# Altium PCB USB_soundcard PCB.pcbdoc (part 2 of 2)
Units mil, origin at the board's own origin, x right, y up, seen from the top; angles counter-clockwise.
Board outline 41897 x 30671 mil, 2 copper layers (Top Layer, Bottom Layer); 93 components, 106 nets, 313 pads, 255 vias.
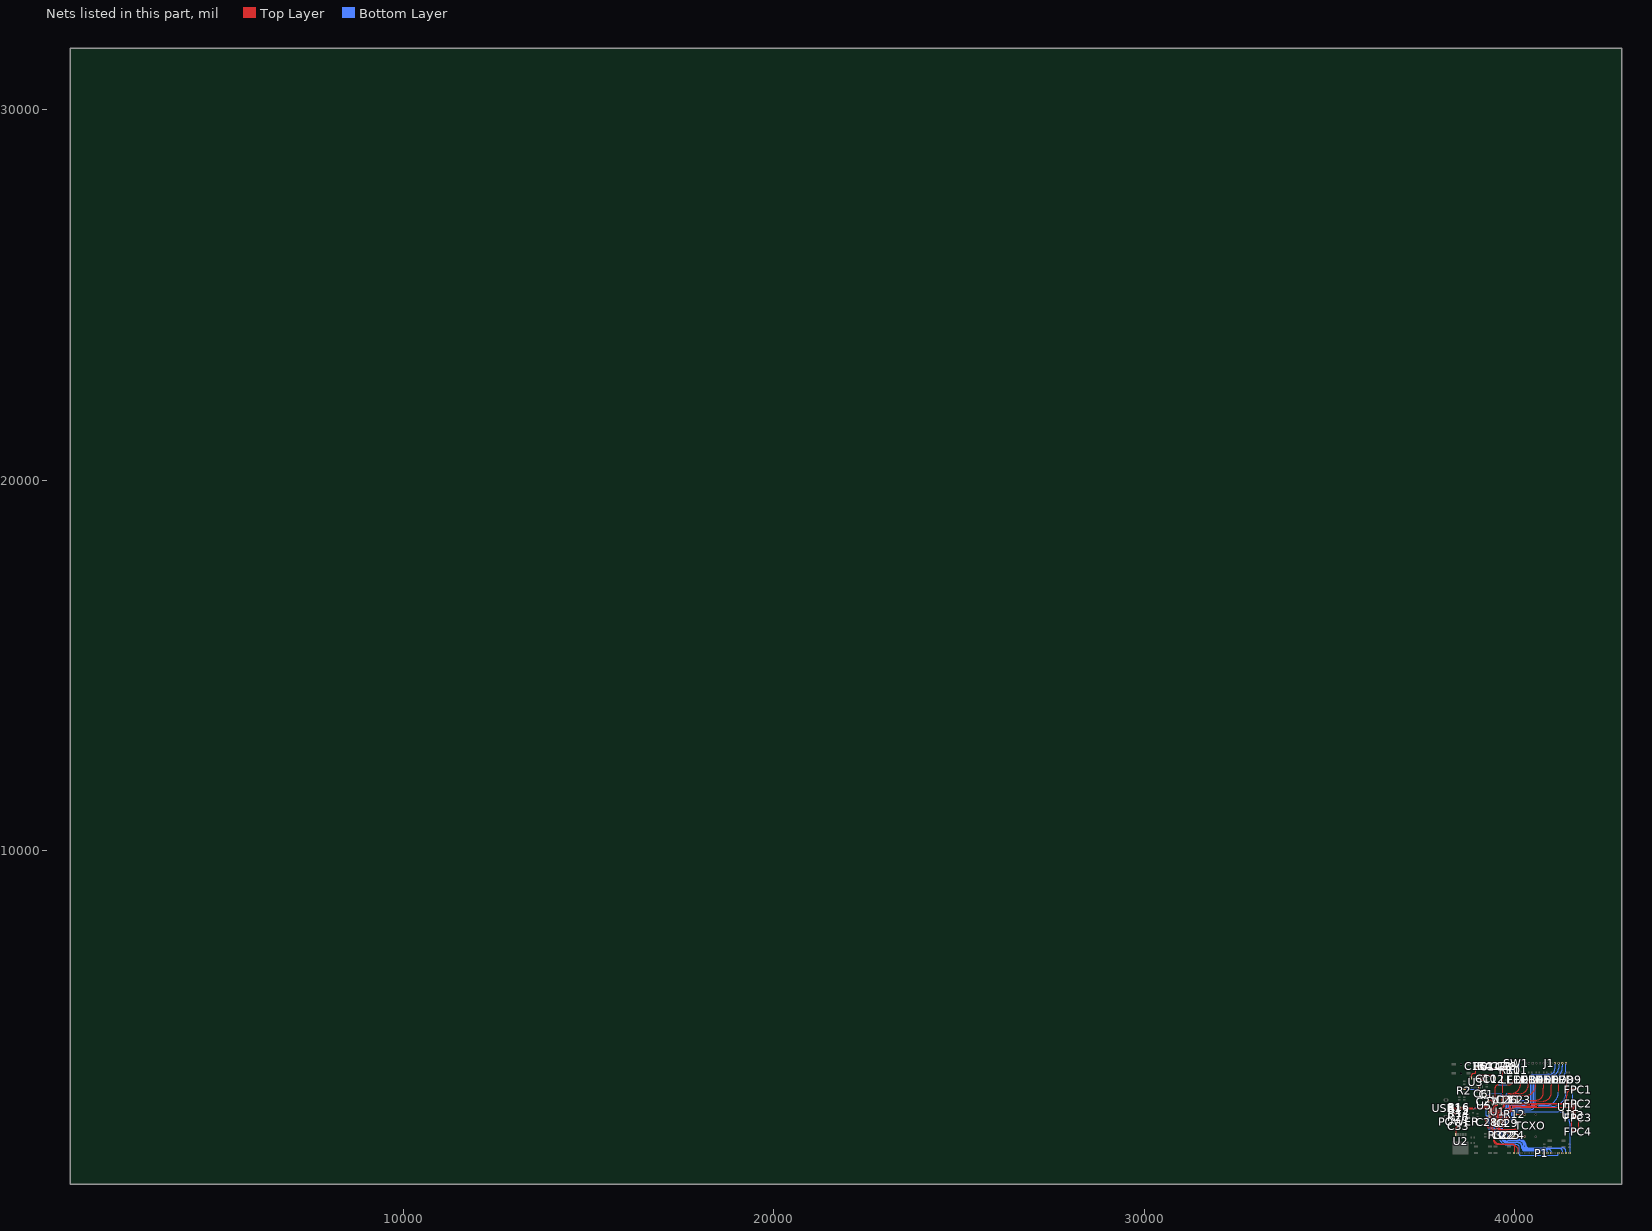
[diagram p2: the nets of this part, all layers, seen from the top]

## Via types
v1: diameter 24, hole 12, Top Layer to Bottom Layer, tented both sides, 255 vias

## Nets (pads, with @x,y where several pads share a name; then routed paths per layer and width w, separated by ;. In a path a pad name is that pad's centre, name@x,y a point inside that pad or via, vN(x,y) a via of type N, cw(c..) or ccw(c..) an arc to the next point about the centre after c; other vN are vias at no path point) (continued)
PB2: LED2.2 U1.28 | length 1053.1
  Top Layer w6: U1.28@39468.04,3167.5 39467.93,3402 39467.93,3586.93 cw(c39559,3586.93) v1(39559,3678) ; v1@39799,3678.1 39832.7,3678 ; 39832.66,3678.05 ccw(c39832.66,3816.05) LED2.2@39970.65,3816.05
  Bottom Layer w6: v1(39559,3678) 39798.9,3678 v1@39799,3678.1 ; 39753.95,3678 ccw(c39753.95,3678.05) 39754,3678.05
  other v1: 39799,3678.05
PB3: LED3.2 U1.55 | length 1557.1
  Top Layer w6: U1.55@39507.4,2730.5 39507.41,2777.41 cw(c39508,2777.41) 39508,2778 39508,2943 39523,2958 v1(39676,2958) ; v1(39805,3435.05) 39883,3441 ; 39883,3441.05 ccw(c39883,3720.05) 40162,3720.05 40162,3809.39 cw(c40168.66,3809.39) LED3.2@40168.65,3816.05 ccw(c40168.66,3812.39) LED3.2@40165,3812.39
  Bottom Layer w6: v1(39676,2958) 39688,2958 39754,3024 39754,3048 39754,3390 ; 39754,3390.05 cw(c39799,3390.05) 39799,3435.05 v1(39805,3435.05)
PB5: LED5.2 U1.57 | length 1920.4
  Top Layer w6: U1.57@39546.78,2730.5 ccw(c39546.78,2730.72) 39547,2730.72 39547,2910 cw(c39571.05,2910) 39571.05,2934.05 v1(39607,2934.05) ; v1@39865,3387.05 40279,3387.05 ccw(c40279,3678.05) 40570,3678.05 40570,3816.05 40573.65,3816.05 ccw(c40573.66,3812.39) LED5.2@40570,3812.39
  Bottom Layer w6: v1@39607,2931.05 cw(c39610,2931.05) v1@39610,2934.05 ; v1(39607,2934.05) 39697,2934 ; 39697,2934.05 ccw(c39697,3025.98) 39788.93,3025.98 39788.93,3061.98 ; 39788.93,3064.98 39788.93,3061.98 ; v1(39868.33,3387.05) ccw(c39868.33,3307.66) 39788.93,3307.66 39788.93,3061.98
PB6: LED6.2 U1.58 | length 2098
  Top Layer w6: U1.58@39566.46,2730.5 39566.47,2824.52 39566.47,2827.52 ; 39566.5,2827.5 39566.5,2874 cw(c39581.5,2874) 39581.5,2889 39592,2889 cw(c39592.05,2889) 39592.05,2889.05 v1(39607,2889.05) ; v1(40309,3270) 40569.2,3267 ; 40569.24,3267 ccw(c40569.24,3475.42) 40777.66,3475.42 ; 40777.66,3471.7 40777.66,3591.7 LED6.2@40777.65,3816.05
  Bottom Layer w6: v1(39607,2889.05) cw(c39616,2889.05) 39616,2898.05 39646,2898.05 39718,2898.05 ccw(c39718,3021.05) 39841,3021.05 39841,3036.05 39841,3074.45 39841,3144.05 cw(c39963.95,3144.05) 39963.95,3267 ; 39961,3267 v1(40309,3270)
PB7: LED7.2 U1.59 | length 2356.8
  Top Layer w6: U1.59@39586,2730.35 39583,2814 v1(39589,2865) ccw(c39589,2862.15) v1@39586.15,2862.15 ; v1(40351,3246) 40765,3243 ccw(c40765,3465) 40987,3465 40987,3546.46 ; 40987,3468 40987,3612.05 40987,3674.39 LED7.2@40987,3810.05
  Bottom Layer w6: v1(39589,2865) 39613,2865 39637,2886 39646,2886 ; 39646,2886.05 39709,2886.05 39730,2886.05 ccw(c39730,3012.05) 39856,3012.05 ; 39856,3012 39856,3105 39856,3138 ; 39856,3135.2 cw(c39966.8,3135.2) 39966.8,3246 v1(40351,3246)
PB8: LED8.2 U1.61 | length 2380.6
  Top Layer w6: U1.61@39625.51,2730.5 39625.5,2796.5 39667,2838 v1@39667,2841.1 ; v1(40306,3132) v1(40624,3132) ; v1(41182,3486.05) 41182,3606.05 41182,3815.35 cw(c41182.7,3815.35) LED8.2@41182.7,3816.05 ; LED8.2@41182,3815.39 cw(c41182.66,3815.39) LED8.2@41182.66,3816.05
  Bottom Layer w6: v1(39667,2841.05) 39682,2841.05 ccw(c39682,3033.05) 39874,3033.05 39874,3047.35 39874,3072.05 39874,3108.05 cw(c39898,3108.05) 39898,3132.05 v1@40312,3132 ; v1(40624,3132) 40828,3132 ; 40828,3132.05 ccw(c40828,3486.05) v1(41182,3486.05)
PC0: P1.8 U1.8 | length 2427.2
  Top Layer w6: v1(39607,2808) 39607,2823 39723.1,2939.2 U1.8@39755.43,2939.16 ; U1.8@39735.11,2939.16 U1.8@39755.43,2939.16 ccw(c39754.55,2939.16) U1.8@39754.55,2940.05
  Bottom Layer w6: 39454,2478 39454,2793 39487.1,2808 v1(39607,2808) ; 39454,2481.9 39454,2472.05 ccw(c39487,2472.05) 39487,2439.05 39523,2439.05 cw(c39523,2304.05) 39658,2304.05 39658,2286.05 ccw(c39805,2286.05) 39805,2139.05 39973,2139.05 39997,2139.05 40060,2139.05 cw(c40060,1980.05) 40219,1980.05 40219,1971.05 ccw(c40276,1971.05) 40276,1914.05 40312,1914.05 40417,1914.05 40615,1914.05 40732,1914.05 cw(c40732,1862.12) 40783.93,1862.12 P1.8@40783.93,1839
PC2: J1.7 U1.10 | length 2466.4
  Top Layer w6: U1.10@39755.43,2978.53 cw(c39755.96,2978.53) 39755.96,2979.05 39808,2979.05 ccw(c39808.05,2979.05) 39808.05,2979 39835,2979 ccw(c39835,3042) 39898,3042 39898,3102 cw(c39910,3102) 39910,3114 40059.9,3114 40258,3153 40270,3156 v1(40423,3153)
  Bottom Layer w6: v1@40420,3156 v1(40423,3153) ; v1@40420,3156.05 ccw(c40420,3171.05) 40435,3171.05 40435,3837.05 40435,3924.05 cw(c40471,3924.05) 40471,3960.05 40888,3960.05 40933,3960.05 ccw(c40933,4110.05) 41083,4110.05 41083,4265.11 cw(c41083.94,4265.11) J1.7@41083.94,4266.05
PC4: LED4.2 U1.24 | length 1336.6
  Top Layer w6: v1(39532,3377.36) 39532,3225 39547,3210 39547,3167.72 cw(c39546.78,3167.72) U1.24@39546.78,3167.5 ; v1(39705.02,3399) 40021,3435 40111,3435 ccw(c40111,3696) 40372,3696 40372,3815.4 cw(c40372.65,3815.4) LED4.2@40372.65,3816.05
  Bottom Layer w6: v1(39532,3377.36) 39553.64,3399 v1(39705.02,3399)
PC5: P1.4 U1.25 | length 3214.1
  Top Layer w6: v1(39442,3030) 39463,3051 39463,3084 ; 39463,3084.05 cw(c39496,3084.05) 39496,3117.05 39511,3117.05 ccw(c39511,3133.15) 39527.1,3133.15 U1.25@39527.1,3167.5
  Bottom Layer w6: 39295,2881.17 39295,2892 39382,2979 39433,3030 v1(39442,3030) ; 39295,2883 39295,2520.05 ccw(c39436,2520.05) 39436,2379.05 39457,2379.05 39517,2379.05 cw(c39517,2307.05) 39589,2307.05 39589,2265.05 ccw(c39790,2265.05) 39790,2064.05 39997,2064.05 40048,2064.05 cw(c40048,1986.05) 40126,1986.05 40126,1848.05 40126,1809.05 ccw(c40162,1809.05) 40162,1773.05 41117.98,1773.05 ccw(c41117.98,1839) P1.4@41183.93,1839
PC8: P1.9 U1.39 | length 2232.6
  Top Layer w6: U1.39@39318.43,2978.53 39388,2979 v1(39415,2979) ; v1(39430,2880) 39430,2874 39430,2814 v1(39436,2808)
  Bottom Layer w6: v1(39415,2979) v1(39430,2880) ; 39436,2466 v1(39436,2808) ; 39436,2466.05 39436,2457.05 ccw(c39469,2457.05) 39469,2424.05 39526,2424.05 cw(c39526,2313.05) 39637,2313.05 39637,2271.05 ccw(c39790,2271.05) 39790,2118.05 39991,2118.05 40027.06,2118.05 40066.46,2118.05 cw(c40066.46,1986.67) 40197.84,1986.67 40197.84,1974.16 ccw(c40273,1974.16) 40273,1899 cw(c40273.05,1899) 40273.05,1899.05 40519,1899.05 40648,1899.05 cw(c40648,1863.12) P1.9@40683.93,1863.12
PC9: LED9.2 U1.40 | length 2913.9
  Top Layer w6: U1.40@39318.43,2958.84 ccw(c39319.28,2958.84) 39319.28,2958 39439,2958 v1(39442,2961) ; v1(39463,2880) v1(39466,2823) ; v1(39919,3093) 40606.4,3093 v1(40612.46,3099.05) ; v1(41389,3501) 41389,3812.4 cw(c41389.65,3812.4) LED9.2@41389.65,3813.05
  Bottom Layer w6: v1(39442,2961) v1(39463,2880) ; v1(39466,2823) 39472,2823 39478,2829 39622,2829 39634,2817 39672.95,2817 ccw(c39672.95,3030.05) 39886,3030.05 39886,3036.05 39886,3069.05 39886,3078 cw(c39901,3078) 39901,3093 v1(39919,3093) ; v1@40609,3099.05 41001.91,3099.05 ccw(c41001.91,3486.14) 41389,3486.14
PC10: P1.7 U1.51 | length 2090.3
  Top Layer w6: U1.51@39428.67,2730.5 39428.67,2605.38 ccw(c39457,2605.38) 39457,2577.05 39463,2577.05 cw(c39463,2532.05) 39508,2532.05 ; v1@39508,2466.1 39508,2532
  Bottom Layer w6: v1(39508,2466.05) ccw(c39520,2466.05) 39520,2454.05 39541,2454.05 39544,2454.05 cw(c39544,2322.05) 39676,2322.05 39676,2304.05 ccw(c39811,2304.05) 39811,2169.05 40126,2169.05 cw(c40126,2049.05) 40246,2049.05 40246,2001.05 ccw(c40315,2001.05) 40315,1932.05 40489,1932.05 40759,1932.05 40828,1932.05 cw(c40828,1876.12) 40883.93,1876.12 P1.7@40883.93,1839
PC11: P1.6 U1.52 | length 2185.6
  Top Layer w6: U1.52@39448.36,2730.5 39448.36,2621.69 ccw(c39466,2621.69) 39466,2604.05 39487,2604.05 cw(c39487,2538.05) 39553,2538.05 39553,2511.05 ccw(c39616,2511.05) 39616,2448.05 39739,2448.05 39748,2448.05 39757,2448.05 39772,2448.05 cw(c39772,2424.05) 39796,2424.05 39796,2397.05 v1(39793,2394.05)
  Bottom Layer w6: v1(39793,2394.05) 39796,2394 39796,2292 ; 39796,2292.05 ccw(c39901,2292.05) 39901,2187.05 40138,2187.05 cw(c40138,2055.05) 40270,2055.05 40270,2034.05 ccw(c40357,2034.05) 40357,1947.05 40564,1947.05 40906,1947.05 cw(c40906,1869.12) 40983.93,1869.12 P1.6@40983.93,1839
PC12: P1.3 U1.53 | length 2454.2
  Top Layer w6: U1.53@39468.04,2730.5 39468.04,2632.01 ccw(c39478,2632.01) 39478,2622.05 39484,2622.05 cw(c39484,2532.05) 39574,2532.05 39574,2517.05 ccw(c39625,2517.05) 39625,2466.05 39736,2466.05 39757,2466.05 39763,2466.05 cw(c39763,2409.05) 39820,2409.05 ; v1@39817,2358.1 39820,2409
  Bottom Layer w6: v1(39817,2358.05) 39817,2289.05 ccw(c39904,2289.05) 39904,2202.05 39907.43,2202.05 ; 39907,2202.05 40138,2202.05 cw(c40138,2046.05) 40294,2046.05 40294,2043.05 ccw(c40372,2043.05) 40372,1965.05 40918,1965.05 41215,1965.05 cw(c41215,1896.12) 41283.93,1896.12 P1.3@41283.93,1839
PC13: J1.8 U1.2 | length 2656.8
  Top Layer w6: U1.2@39755.4,2821.1 39757.4,2823 v1(39877,2820.05)
  Bottom Layer w6: v1(39877,2820.05) ccw(c39877,2865.05) 39922,2865.05 39922,2964.05 39922,3012.05 cw(c39988,3012.05) 39988,3078.05 40210,3078.05 40324,3078.05 40378,3078.05 ccw(c40378,3180.05) 40480,3180.05 40480,3226.57 40480,3834.05 cw(c40579,3834.05) 40579,3933.05 40984,3933.05 ccw(c40984,4134.05) 41185,4134.05 41185,4264.99 ccw(c41183.94,4264.99) J1.8@41183.94,4266.05
PC14: J1.9 U1.3 | length 2934.3
  Top Layer w6: U1.3@39755.43,2840.73 39726.68,2840.73 ccw(c39726.68,2823.05) 39709,2823.05 39709,2796.05 ccw(c39730.05,2796.05) 39730.05,2775 39733,2775 v1(39877,2775.05)
  Bottom Layer w6: v1(39877,2775.05) 39892,2775 ; 39892,2775.05 ccw(c39892,2823.05) 39940,2823.05 39940,2862.05 39940,2934.05 39940,3012.05 cw(c39988,3012.05) 39988,3060.05 40117,3060.05 40387,3060.05 ccw(c40387,3192.05) 40519,3192.05 40519,3816.05 cw(c40600,3816.05) 40600,3897.05 41002,3897.05 41056,3897.05 ccw(c41056,4125.05) 41284,4125.05 41284,4179.05 ; J1.9@41283.94,4266.05 cw(c41283.94,4265.99) 41284,4265.99 41284,4175.83
PC15: J1.10 U1.4 | length 3120.7
  Top Layer w6: 39733,2751 39733.05,2751.05 v1(39853,2751.05) ; 39733,2751.05 cw(c39733,2793.05) 39691,2793.05 39691,2796.05 39691,2811.05 cw(c39740.37,2811.05) 39740.37,2860.42 U1.4@39755.43,2860.42
  Bottom Layer w6: v1(39853,2751.05) 39901,2751.05 ccw(c39901,2808.05) 39958,2808.05 39958,2862.05 39958,2976.05 cw(c39988,2976.05) 39988,3006.05 40414,3006.05 ccw(c40414,3141.05) 40549,3141.05 40549,3399.05 40549,3786.05 40549,3798.05 cw(c40612,3798.05) 40612,3861.05 41080,3861.05 41152,3861.05 ccw(c41152,4092.99) 41383.94,4092.99 J1.10@41383.94,4266.05
PD2: P1.2 U1.54 | length 2550.2
  Top Layer w6: U1.54@39487.72,2730.5 ccw(c39487.73,2729.77) 39487,2729.77 39487,2646.05 ccw(c39496,2646.05) 39496,2637.05 39511,2637.05 cw(c39511,2553.05) 39595,2553.05 39595,2517.05 ccw(c39628,2517.05) 39628,2484.05 39736,2484.05 40003,2484.05 cw(c40003,2418.05) 40069,2418.05 v1(40069,2358.05)
  Bottom Layer w6: v1(40069,2358.05) 40069,2244.05 ccw(c40096,2244.05) 40096,2217.05 40129,2217.05 cw(c40129,2034.05) 40312,2034.05 ccw(c40363,2034.05) 40363,1983.05 40411,1983.05 40975,1983.05 41281,1983.05 cw(c41281,1880.12) 41383.93,1880.12 P1.2@41383.93,1839
PH1: P1.1 U1.6 | length 2747.6
  Top Layer w6: v1(39988,2955.05) 39835.33,2937.38 ccw(c39835.33,2916.05) 39814,2916.05 39814,2913.05 cw(c39802,2913.05) 39802,2901.05 U1.6@39756.7,2901.05 ; U1.6@39756.7,2901.05 ccw(c39756.7,2899.79) U1.6@39755.43,2899.79 cw(c39756.7,2899.79) U1.6@39756.7,2901.05
  Bottom Layer w6: v1(39988,2955.05) 41178.95,2955 ; 41172.85,2955 cw(c41172.85,2643.92) 41483.93,2643.92 P1.1@41483.93,1839
  Bottom Layer w10: v1(39988,2955.05) ccw(c39991.05,2955.05) v1@39991.05,2952
POWER_1: POWER.1 R26.1 | length 117.6
  Top Layer w15: R26.1@38457.63,2805.05 cw(c38457.63,2804.03) R26.1@38458.65,2804.03
  Top Layer w20: POWER.1@38458.65,2688.05 R26.1@38458.65,2804.03
R10_2: R10.2 SW1.3 | length 146.2
  Bottom Layer w15: R10.2@39922,4077 39922,4173.89 cw(c39953.42,4173.89) SW1.3@39953.42,4205.31
S$423: 
S$432: 
S$5796: 
S$5890: 
S$12789: 
S$18079: 
S$18081: 
S$18084: 
S$18087: 
S$18089: 
S$18092: 
S$19015: 
S$19059: 
S$22385: 
S$24787: 
S$24847: 
S$24849: 
S$25444: 
S$26904: 
S$26910: 
S$26912: 
SAI1_FS_A: U1.17 U12.1 | length 105.7
  Top Layer w6: U1.17@39684.57,3167.5 39685,3167.92 U12.1@39685,3273
SAI1_FS_B: U1.62 U4.1 | length 101.7
  Top Layer w6: U4.1@39622,2643 ccw(c39622,2667) 39646,2667 39646,2673 39646,2679 39646,2688 39646,2729.71 ccw(c39645.21,2729.71) U1.62@39645.21,2730.5
SAI1_SCK_A: U1.29 U1.37 | length 238.1
  Top Layer w6: U1.37@39318.43,3017.9 39351.85,3017.9 ccw(c39351.85,3114.05) 39448,3114.05 39448,3167.14 cw(c39448.36,3167.14) U1.29@39448.36,3167.5
SAI1_SCK_B: U1.33 U5.1 | length 156.8
  Top Layer w6: U5.1@39175,3120 ccw(c39198.36,3120) 39198.36,3096.64 U1.33@39318.43,3096.64
SAI1_SD_A: FPC2.2 FPC4.2 U1.9 U11.1 | length 2886
  Top Layer w6: 40021,3075 39982,3075.05 ccw(c39982,3033.05) 39940,3033.05 39940,3030.05 cw(c39868,3030.05) 39868,2958.05 39823,2958.05 U1.9@39756.23,2958.05 ; 40021,3075.05 40036,3075.05 40165,3075.05 v1(41533,3075) cw(c41533,3063) 41545,3063 41545,2829 ; U11.1@41464,3075 41538.3,3075 cw(c41538.3,3075.37) v1@41537.93,3075.37 ; 41545,2833.11 41545,2490 ccw(c41608,2490) 41608,2427 FPC4.2@41669.98,2427 ; v1(41617,3171) 41638,3177 FPC2.2@41670.82,3177.84 cw(c41669.98,3177.85) FPC2.2@41669.98,3177 ; U1.9@39756.23,2958.05 cw(c39756.23,2958.84) U1.9@39755.43,2958.84 ccw(c39756.23,2958.84) U1.9@39756.23,2958.05 ; FPC4.2@41669.98,2427 ccw(c41669.98,2427.84) FPC4.2@41670.82,2427.84 ; FPC4.2@41669.98,2427 ccw(c41669.98,2427.85) FPC4.2@41670.82,2427.84 ; FPC4.2@41669.98,2427 ccw(c41669.98,2427.85) FPC4.2@41670.82,2427.84
  Bottom Layer w6: v1@41530,3075 v1(41533,3075) ccw(c41533,3108) 41566,3108 41566,3117 41566,3120 cw(c41617,3120) v1(41617,3171)
SAI1_SD_B: FPC1.2 FPC3.2 U1.42 U13.1 | length 3332.3
  Top Layer w6: U1.42@39318.07,2919 cw(c39318.07,2919.05) U1.42@39318.02,2919.05 ; U1.42@39318.1,2919 39466,2919 39541,2994 39607,2994 39706,3096 39709,3100 39715,3138 cw(c39751,3138) 39751,3174 41329,3174 v1(41494,3159) cw(c41494,3075) 41578,3075 U13.1@41581,2862 ccw(c41646.16,2862) 41646.16,2796.84 FPC3.2@41670.82,2796.84 ; v1(41608,3558) 41670,3561 ccw(c41669.98,3561.85) FPC1.2@41670.82,3561.84 ; FPC3.2@41666.98,2793 ccw(c41666.98,2796.84) FPC3.2@41670.82,2796.84 ; U1.42@39318.02,2919.05 ccw(c39318.02,2919.47) U1.42@39318.43,2919.47 cw(c39318.02,2919.47) U1.42@39318.02,2919.05 ; FPC3.2@41670.82,2796.84 cw(c41669.98,2796.84) 41669.98,2796 ccw(c41669.98,2796.84) FPC3.2@41670.82,2796.84
  Bottom Layer w6: v1(41494,3159) ccw(c41494,3237) 41572,3237 41572,3264.86 ; 41572,3261 41572,3462 41572,3519 cw(c41614,3519) 41614,3561 v1(41608,3558)
SW1_1: R11.2 SW1.1 | length 137.4
  Bottom Layer w15: R11.2@40114.74,4077 40114.74,4189.47 cw(c40130.58,4189.47) SW1.1@40130.58,4205.31
SWCLK: P1.15 U1.49 | length 1440
  Top Layer w6: U1.49@39389.29,2730.5 39389.3,2470.75 ccw(c39406,2470.75) 39406,2454.05 39421,2454.05 cw(c39421,2439.05) 39436,2439.05 39436,2238.05 ccw(c39577,2238.05) 39577,2097.05 39961,2097.05 40083.93,1974.12 P1.15@40083.93,1839
SWDIO: P1.16 U1.46 | length 1575.8
  Top Layer w6: U1.46@39318.43,2840.73 U1.46@39337.32,2840.73 ; U1.46@39325.94,2840.73 cw(c39326.26,2840.73) 39326.26,2841.05 39358,2841.05 cw(c39358,2826.05) 39373,2826.05 39373,2814.05 39373,2733.05 39373,2454.05 ccw(c39400,2454.05) 39400,2427.05 cw(c39400,2403.05) 39424,2403.05 39424,2199.05 ccw(c39547,2199.05) 39547,2076.05 39846.88,2076.05 39946,2076.05 39983.93,2038.12 P1.16@39983.93,1839
TCXO_3: R12.1 TCXO.3 | length 230.6
  Top Layer w6: R12.1@40037.36,2881 TCXO.3@40268,2881
TCXO_4: C22.1 C24.2 C25.1 L2.2 TCXO.4 | length 701.9
  Top Layer w15: L2.2@39613,2280.61 39708.45,2280.61 cw(c39708.45,2256.05) C22.1@39733.01,2256.05 ; C25.1@39868,2282.68 C24.2@39988,2282.68 ; C25.1@39868,2285.68 cw(c39868,2282.68) C25.1@39871,2282.68 ; C24.2@40000,2285.68 cw(c40000.37,2285.68) C24.2@40000.37,2286.05
  Top Layer w16: C22.1@39733.01,2262.05 39847.37,2262.05 ccw(c39847.37,2282.68) C25.1@39868,2282.68 ; C24.2@39987.99,2285.68 C24.2@40009.37,2285.68 ; C24.2@39996.19,2282.68 TCXO.4@40263.32,2282.68 ; TCXO.4@40263.32,2285.68 cw(c40263.32,2281) TCXO.4@40268,2281
TIM8_CH2: FPC1.1 FPC2.1 FPC3.1 FPC4.1 U1.38 | length 4024.1
  Top Layer w6: U1.38@39318.43,2998.21 39319.7,2997 39382,2997 39394,3009 39601,3009 39691,3099 39703,3144 cw(c39748,3144) 39748,3189 40624,3189 41290,3189 ccw(c41290,3300) 41401,3300 41401,3306 41401,3390 cw(c41592.53,3390) 41592.53,3581.53 FPC1.1@41670.82,3581.52 ; U1.38@39318.43,2998.21 ccw(c39319.65,2998.21) U1.38@39319.65,2997 ; 41295.96,3189.16 41463.84,3189.16 ; 41463.8,3189.2 41529.8,3189.2 ; 41517.73,3189.2 cw(c41517.73,3080.93) 41626,3080.93 41626,3048 41626,2862 41626,2835 ccw(c41644.47,2835) 41644.47,2816.53 FPC3.1@41670.82,2816.52 ; 41529.84,3189.16 FPC2.1@41670.82,3197.52 ; FPC3.1@41667.35,2820 cw(c41667.35,2816.53) FPC3.1@41670.82,2816.52 ; FPC4.1@41670.82,2447.52 41697.53,2447.53 ccw(c41697.53,2472) 41722,2472 41722,2793 ccw(c41698.47,2793) 41698.47,2816.53 FPC3.1@41670.82,2816.52 ; FPC3.1@41670.82,2816.52 ccw(c41670.35,2816.53) 41670.35,2817 cw(c41670.35,2816.53) FPC3.1@41670.82,2816.52
U1_30: C1.1 U1.30 | length 328.9
  Top Layer w10: C1.1@39247,3392.68 cw(c39247,3211.01) 39428.67,3211.01 U1.30@39428.67,3167.5
U1_60: R3.2 U1.60 | length 468.7
  Top Layer w6: R3.2@39478,2358.41 R3.2@39478,2364.05 ; R3.2@39487,2358.42 ccw(c39487,2400.42) 39529,2400.42 v1(39529,2550.05) ; v1(39529,2661) 39529,2670 cw(c39538,2670) 39538,2679 39547,2679 39592,2679 ccw(c39592,2691) 39604,2691 39604,2728.66 cw(c39605.84,2728.66) U1.60@39605.83,2730.5
  Bottom Layer w6: v1(39529,2550.05) 39529,2598.1 v1(39529,2661)
U2_5: C33.2 U2.5 | length 236.3
  Top Layer w20: U2.5@38403.93,2340.77 38403.93,2494.37 cw(c38456.57,2494.37) C33.2@38456.57,2547
U3_6: C6.1 R2.2 U3.6 | length 561.9
  Top Layer w6: U3.6@39028.93,3631 cw(c39028.93,3630.01) U3.6@39029.93,3630.01
  Top Layer w15: R2.2@38639.93,3561.37 ccw(c38640.3,3561.37) 38640.3,3561 v1(38702.94,3561) ; U3.6@39028.93,3631 ccw(c39028.93,3629) 39026.93,3629 39026.93,3579 v1(39026.93,3561) ccw(c39089.93,3561) 39089.93,3498 C6.1@39092.93,3498
  Bottom Layer w20: v1(38702.94,3561) v1(39026.93,3561)
U3_9: C10.1 U3.9 | length 124.5
  Top Layer w6: U3.9@39129.93,3870 ccw(c39129.93,3869) U3.9@39128.93,3869 cw(c39139.31,3869) 39139.31,3879.37 C10.1@39245.93,3879.37
U3_10: C10.2 U3.10 | length 206
  Top Layer w6: U3.10@39078.93,3869 ccw(c39147.31,3869) 39147.31,3800.63 C10.2@39245.93,3800.63
U3_11: C12.2 U3.11 | length 504.4
  Top Layer w6: U3.11@39028.93,3869 39028.93,3896 cw(c39065.93,3896) 39065.93,3933 39396.31,3933 cw(c39396.31,3876.37) C12.2@39452.93,3876.37
U3_15: C15.2 R6.1 U3.15 | length 521.6
  Top Layer w15: U3.15@38828.93,3869 38828.94,3916.99 cw(c38899,3916.99) 38899,3987.05 38908,3987.05 ccw(c38908,4035.05) 38956,4035.05 C15.2@38956,4135.57
  Top Layer w20: U3.15@38828.94,3880.99 U3.15@38828.93,3869 U3.15@38828.94,3904.99 ; C15.2@38956,4135.57 ccw(c38954.93,4135.57) C15.2@38954.93,4136.63 R6.1@39083.93,4136.63
USB1_1: R14.2 USB1.1 | length 259.6
  Top Layer w20: USB1.1@38239.3,2922 ccw(c38239.3,2910.2) USB1.1@38227.5,2910.2 38468.36,2910.2 cw(c38468.36,2910.05) R14.2@38468.51,2910.05
  other v1: 38305,2877 38359,2877 38413,2877 38305,2934 38359,2934 38413,2934
USB1_2: R15.2 USB1.2 | length 262.4
  Top Layer w6: USB1.2@38227.5,3008.63 38257.9,3039 38417.9,3039 38441.9,3015 R15.2@38467.44,3015
USB1_3: R16.2 USB1.3 | length 262.5
  Top Layer w6: USB1.3@38227.5,3087.37 38228.57,3087.37 38258.93,3057 38420.93,3057 38444.93,3081 R16.2@38467.44,3081
USB_OTG_HS_DM: R15.1 U1.35 | length 820.3
  Top Layer w8: R15.1@38530.43,3015 38555.9,3015 38579.9,3039 38870.9,3039 38879.9,3030 v1(38885.94,3030) ; v1(38966.93,3066) 38981.9,3066 38990.9,3057 U1.35@39318.43,3057.27
  Bottom Layer w8: v1(38885.94,3030) 38912.9,3030 38948.9,3066 v1(38966.93,3066)
USB_OTG_HS_DP: R16.1 U1.36 | length 818.9
  Top Layer w8: R16.1@38530.43,3081 38555.9,3081 38579.9,3057 38867.9,3057 38876.9,3066 v1(38885.94,3066) 38912.9,3066 38948.9,3030 v1(38966.93,3030) ; v1(38966.93,3030) 38981.94,3030 38990.94,3039 U1.36@39317.02,3039
VDD: C14.1 C17.2 C18.2 C19.2 C26.2 C27.2 C28.2 C29.2 L1.1 R4.2 U1.1 U1.19 U1.32 U1.48 U1.64 | length 4854.9
  Top Layer w10: C28.2@39234.16,2703.89 cw(c39234.16,2721.05) 39217,2721.05 39217,2763.05 cw(c39255.31,2763.05) 39255.31,2801.36 U1.48@39318.43,2801.36 ; C27.2@39289,3256.73 ccw(c39286.84,3256.73) C27.2@39286.84,3258.89 cw(c39292,3258.89) 39292,3264.05 39343,3264.05 cw(c39343,3217.75) 39389.3,3217.75 U1.32@39389.29,3167.5 ; U1.19@39645.21,3167.5 ccw(c39645.21,3168.29) 39646,3168.29 39646,3300 v1(39667,3321) ; U1.64@39684.57,2730.5 cw(c39684.58,2730.08) 39685,2730.08 39685,2682.05 ccw(c39754.84,2682.05) 39754.84,2612.21 C29.2@39786.16,2612.21 ; v1@39692.53,2650.5 cw(c39692.53,2649.03) 39694,2649.03 v1@39694,2499.05 ; U1.1@39755.43,2801.36 cw(c39756.13,2801.36) 39756.13,2802.05 39835,2802.05 ; 39835,2802 39847,2802 v1(39853,2796.05)
  Top Layer w15: R4.2@39206.93,4139.63 39333.31,4139.63 cw(c39333.31,4110) C14.1@39362.93,4110 39483.31,4110 ccw(c39483.31,4139.63) C17.2@39512.93,4139.63 C18.2@39656.93,4139.63 ccw(c39659.94,4139.63) 39659.94,4136.63 C19.2@39788.93,4136.63 ; v1(39271,2754.05) C28.2@39234.16,2703.89 ccw(c39234.16,2689.73) 39220,2689.73 39220,2589.05 ccw(c39250,2589.05) 39250,2559.05 39253,2559.05 cw(c39253,2535.05) 39277,2535.05 ccw(c39295,2535.05) 39295,2517.05 ; v1(39283,3336) 39283,3273.05 ccw(c39292,3273.05) C27.2@39292,3264.05 ; v1(39289,3159) C27.2@39289,3256.73 ; 39295,2517 v1(39319,2517) ; v1(39412,2487.05) v1(39481,2487.05) ; C18.2@39667,4125 v1(39667,3444) v1(39667,3321) 39756.95,3321 39757,3321.05 cw(c39757,3303.89) C26.2@39774.16,3303.89 cw(c39797.32,3303.89) 39797.32,3327.05 39907,3327.05 39925,3327.05 cw(c39925,3287.48) 39964.57,3287.48 L1.1@39964.57,3282.05
  Bottom Layer w10: v1(39694,2652.05) 39751,2652.05 ccw(c39751,2697.05) 39796,2697.05 39796,2739.05 cw(c39853,2739.05) v1(39853,2796.05)
  Bottom Layer w15: 39217,3078 v1(39289,3159) ; 39217,3078.05 39217,2874.05 ccw(c39238,2874.05) 39238,2853.05 39244,2853.05 cw(c39244,2826.05) 39271,2826.05 v1(39271,2754.05) ; v1(39283,3336) 39283,3414 39331,3453 39616,3444 v1(39667,3444) ; v1(39319,2517) 39367,2517 ; 39367,2517.05 cw(c39367,2496.05) 39388,2496.05 ccw(c39397,2496.05) 39397,2487.05 v1(39412,2487.05) ; v1(39481,2487.05) 39493,2499.05 39505,2499.05 39687.48,2499.05 ccw(c39687.48,2505.57) v1(39694,2505.57)
VDDA: C23.2 L1.2 U1.13 | length 499.5
  Top Layer w10: U1.13@39755.43,3037.58 39810.98,3037.58 ccw(c39810.98,3088.6) 39862,3088.6 39862,3123 39862,3132 cw(c39880,3132) v1(39880,3150) v1@39880,3156 ; L1.2@40035.43,3282.05 cw(c40035.44,3281.49) L1.2@40036,3281.49
  Top Layer w15: v1(39967,3222) L1.2@40036,3281.5 ; L1.2@40035.43,3282.05 C23.2@40116.63,3282.05
  Bottom Layer w15: v1(39880,3150) v1(39967,3222)
pads on no net: AUDIO_OUTPUT. FPC1.5 FPC1.6 FPC2.5 FPC2.6 FPC3.5 FPC3.6 FPC4.5 FPC4.6 SW1. SW1.4 SW1.5 SW1.6 SW1.7 TCXO.1 U3.16 USB1.
copper on no net:
  other v1: 1512,31159

## Polygon pours and split planes (outlines as drawn)
GND on Bottom Layer (solid): 38827,4005 38827,4443 38851,4443 38851,4446 38857,4446 38857,4443 38857,4005 38827,4005
GND on Bottom Layer (solid): 39265,3999 38827,3999 38827,4023 38824,4023 38824,4029 38827,4029 39532,4029 39532,4011 39532,4002
GND on Bottom Layer (solid): 39505,3570 39505,4008 39529,4008 39529,4011 39535,4011 39535,4008 39535,3570 39505,3570
GND on Bottom Layer (solid): 39532,3570 39127,3567 39127,3588 39127,3591 39130,3600 39139,3600 39532,3600 39532,3570
GND on Bottom Layer (solid): 39136,3285 39139,3579 39148,3594 39157,3591 39163,3594 39169,3594 39166,3285 39136,3285
GND on Bottom Layer (solid): 38899,3285 37921,3291 37930,3297 37927,3303 37915,3303 37924,3321 39166,3315 39166,3297 39166,3288
AGND on Bottom Layer (solid): 37837,3309 37837,3948 38326,3948 38326,4410 38782,4419 38836,4419 38836,4416 38842,4416 38842,4014 39010,4008 39007,3591 38872,3591 38872,3312 37837,3309
GND on Bottom Layer (solid): 39643,3087 39643,2973 39697,2973 39697,3084 39694,3084
GND on Bottom Layer (solid): 40456,3039 40438,3078 40444,3084 40477,3102 40507,3144 40522,3168 40549,3171 40549,3128.08 40552,3135 40549,3117 40549,3128.08 40513,3045 40480,3012 40483,3033 40462,3024
GND on Bottom Layer (solid): 40522,3189 40501,3150 40495,3138 40465,3141 40477,3900 40531,3939 40621,3948 40699,3945 40921,3945 40780,3960 40741,3975 40735,4011 40738,4080 41392,4071 41383,4020 41362,3975 41320,3927 41257,3885 41179,3861 41086,3861 40780,3861 40603,3858 40567,3843 40543,3798 40531,3582 40528,3216 40522,3201
GND on Bottom Layer (solid): 40021,3339 40030,3384 40210,3384 40210,3477 40288,3477 40288,3570 40327,3570 40327,3825 40327,3963 40435,3963 40435,3972 40438,3972 40438,3963 40435,3963 40435,3339 40021,3339
GND on Bottom Layer (solid): 39634,3600 39634,3504 40282,3504 40282,3783 39916,3783 39916,3699 39901,3699 39901,3654 39637,3654
GND on Bottom Layer (solid): 39691,2832 39799,2859 39814,2874 39850,2838 39829,2808 39781,2790 39715,2787 39688,2787 39688,2826
GND on Bottom Layer (solid): 39670,2775 39790,2784 39877,2781 39880,2712 39877,2655 39853,2655 39751,2655 39685,2649 39673,2658 39670,2739
GND on Bottom Layer (solid): 39847,2952 cw(c39881.51,2953.33) 39916,2955 cw(c39911.35,2925.02) 39907,2895 39892,2895 39880,2907 39868,2907 39844,2931 39847,2952
GND on Bottom Layer (solid): 39283,3180 39340,3180 39340,3177 39343,3111 39385,3087 39412,3030 39301,2994 39232,2991 39220,3060 39253,3129 39274,3168
GND on Bottom Layer (solid): 39157,2859 39283,2862 39286,2811 39256,2826 39163,2826 39157,2856
GND on Bottom Layer (solid): 39670,2301 39808,2301 39808,2283 39817,2238 39880,2175 39799,2157 39688,2220 39673,2274
GND on Bottom Layer (solid): 39958,3204 39958,3123 39895,3123 39895,3192 39952,3207
GND on Bottom Layer (solid): 37669,4494 42127,4494 42127,1668 37690,1668 37690,1851
GND on Top Layer (solid): 37937.93,3285 38237.93,3285 38237.93,3306 37937.93,3306
GND on Top Layer (solid): 38111.93,3285 38411.93,3285 38411.93,3306 38111.93,3306
GND on Top Layer (solid): 38342.93,3285 38642.93,3285 38642.93,3306 38342.93,3306
GND on Top Layer (solid): 38597.93,3285 38897.93,3285 38897.93,3306 38597.93,3306
GND on Top Layer (solid): 38867.93,3285 39167.93,3285 39167.93,3306 38867.93,3306
GND on Top Layer (solid): 39146.93,3585 39146.93,3285 39167.93,3285 39167.93,3585
GND on Top Layer (solid): 39434.93,3564 39539.94,3564 39539.94,3585 39434.93,3585
GND on Top Layer (solid): 39146.93,3564 39446.93,3564 39446.93,3585 39146.93,3585
GND on Top Layer (solid): 39539.93,3567 39536.94,4032 39515.94,4032 39518.93,3567
GND on Top Layer (solid): 39088,4029.05 38623,4026.05 38623,4005.05 39088,4008.05
GND on Top Layer (solid): 39535,4032.05 39070,4029.05 39070,4008.05 39535,4011.05
GND on Top Layer (solid): 38833,4473.05 38836,4008.05 38857,4008.05 38854,4473.05
GND on Top Layer (solid): 39655,3183 39655,3186 39655,3261 39655,3306 39676,3306 39676,3186 39655,3186 39655,3183
AGND on Top Layer (solid): 38800,3600 38980,3600 38980,3411 38800,3411 38800,3423 38797,3423
AGND on Top Layer (solid): 39451,3990 39526,3990 39526,3729 39460,3729 39460,3735 39454,3735
AGND on Top Layer (solid): 37913.5,4339.5 38945.5,4339.5 38945.5,3790.5 39626.5,3790.5 39632.5,3790.5 39632.5,3346.5 39257.5,3346.5 39257.5,3064.5 37913.5,3064.5 37913.5,3928.5
GND on Top Layer (solid): 41374,3321 41683,3321 41686,3021 41374,3018
GND on Top Layer (solid): 39907,3174 39907,3102 40312,3102 40312,3171 40288,3171
GND on Top Layer (solid): 39457,3090 39457,2985 39691,2985 39691,3090 39676,3090 39613,3090 39535,3090 39535,3126 39457,3126
GND on Top Layer (solid): 39622,2829 39622,2769 39685,2769 39685,2829 39682,2829
GND on Top Layer (solid): 39967,2061 39967,1839 40456,1839 40456,2043 40441,2043 40159,2043 40159,2064 40132,2064
GND on Top Layer (solid): 40765,3381 40741,3342 40705,3306 40669,3285 40627,3267 40618,3252 40612,3234 40822,3249 40936,3318 40990,3444 40993,3465 40993,3474 40783,3474 40780,3423
GND on Top Layer (solid): 38917,4011 38917,3936 39523,3936 39523,4020 39520,4020 39520,4017 39235,4017
GND on Top Layer (solid): 39916,3156 39823,3156 39823,3069 39784,3069 39784,3048 39778,3048 39778,2976 39865,2976 39865,2967 39943,2958 39943,3000 39943,3018 39916,3066 39889,3066 39889,3114 39937,3114 39937,3126 39931,3126 39931,3150 39931,3153
GND on Top Layer (solid): 39649,2634 39649,2487 39637,2436 39538,2436 39538,2493 39529,2493 39529,2589 39535,2589 39535,2655 39538,2655 39538,2670 39592,2670 39592,2679 39625,2679 39625,2676 39625,2673
GND on Top Layer (solid): 39415,2214 39541,2214 39553,2214 39553,2049 39418,2049 39418,2052 39409,2052 39409,2145
GND on Top Layer (solid): 39877,3417 39892,3387 40099,3390 40327,3390 40417,3423 40504,3489 40549,3570 40558,3606 40141,3612 40102,3540 40012,3477 39925,3450
GND on Top Layer (solid): 37768,1521 37768,4569 42397,4569 42397,1521 42397,1500 42397,1521 37768,1521

## Keep-outs
Keep-Out Layer:
  lines w10: 37949.94,1985.01 ccw(c38186.15,1985.01) 38186.15,1748.79 ; 37949.94,4110.99 cw(c38186.15,4110.99) 38186.15,4347.21 ; 41650.72,4347.21 cw(c41650.72,4110.99) 41886.94,4110.99
  lines w10 net S$24787: 41656,1746 ccw(c41656,1976.94) 41886.94,1976.94

## Other copper
Top Layer:
  region net C7_1: 38665,2859 38839,2859 38839,2802 38731,2802 38731,2799 38731,2802 38665,2823
  region net C7_1: 38779,2841 38779,2859 38833,2859 38839,2859 38839,2949 39052,2949 39052,2880 38905,2880 38905,2841 38791,2841 38791,2838
  region net C7_1: 38665,2835 38764,2835 38764,2298 38665,2298 38665,2814
  region net 5V_USB: 38530,2949 38527,2949 38527,2766 38629,2766 38629,2874 38806,2874 38806,2949 38557,2949
  region net USB1_1: 38224,2952 38503,2952 38503,2859 38227,2859 38227,2862 38227,2877

## Silkscreen, mask and mechanical layers (free items; w line width, h text height)
Top Overlay:
  lines w6 net S$18079: 41533,1885.24 41533,1962
  lines w6 net S$18081: 39933.06,1888.95 39933.06,1962 41533,1962
  lines w6 net S$18084: 40230,1887 40236.43,1887 40236.43,1960.05 ; 40530,1887 40536.43,1887 40536.43,1960.05 ; 40830,1887 40836.43,1887 40836.43,1960.05 ; 41127,1893 41133.43,1893 41133.43,1966.05 ; 41430.56,1888.95 41437,1888.95 41437,1962
  lines w6 net S$18087: 40137,1960.05 40137,1887 40141,1887 ; 40429,4215 40433,4215 40433,4141.95 ; 40437,1960.05 40437,1887 40441,1887 ; 40732,4215 40736,4215 40736,4141.95 ; 40737,1960.05 40737,1887 40741,1887 ; 41032,4215 41036,4215 41036,4141.95 ; 41034,1966.05 41034,1893 41038,1893 ; 41337.57,1962 41337.57,1888.95 41341.57,1888.95
  lines w6 net S$18089: 40033,1887 40034,1887 40034,1960.05 ; 40333,1887 40334,1887 40334,1960.05 ; 40536,4141.95 40536,4215 40537,4215 ; 40633,1887 40634,1887 40634,1960.05 ; 40839,4141.95 40839,4215 40840,4215 ; 40930,1893 40931,1893 40931,1966.05 ; 41139,4141.95 41139,4215 41140,4215 ; 41233.57,1888.95 41234.57,1888.95 41234.57,1962
  lines w6 net S$18092: 40331.43,4143 40331.43,4216.05 40333.43,4216.05 ; 40635,4141.95 40635,4215 40637,4215 ; 40938,4141.95 40938,4215 40940,4215 ; 41238,4141.95 41238,4215 41240,4215 ; 41333,4141.95 41333,4215 41335,4215 ; 41435,4141.95 41435,4215 41437,4215
  lines w6 net S$19015: 41176,2622 41176,3258
  lines w6 net S$19059: 41329,2271 41329,3696.05
  lines w6 net S$24847: 40236,4216 40236,4143 40237,4143
  lines w6 net S$24849: 40237,4140 41435,4140 41435,4138.95
  lines w6 net S$5796: 38184.19,3050.88 ccw(c38187.06,3050.88) 38187.06,3048
  lines w6 net S$5890: 41329,2271 41884,2271 ; 41329,3696 41884,3696 ; 41335,3876 41890,3876
  lines w10 net S$12789: 39700,3873.05 39700,3696.05 41545,3696.05 41545,3876.05 39700,3876.05
  lines w10 net S$22385: 39908.93,3696.05 39908.93,3875.34 cw(c39909.64,3875.34) 39909.64,3876.05 ; 40108,3696.71 40108,3876 ; 40309,3696.71 40309,3876 ; 40513,3696.71 40513,3876 ; 40717,3696.71 40717,3876 ; 40918,3696.71 40918,3876 ; 41122,3696.71 41122,3876 ; 41326,3696.71 41326,3876
  text "A10" at 40243,4143.5 h35
  text "B0" at 40354,4143.5 h35
  text "A7" at 40456,4143.5 h35
  text "A5" at 40555,4143.5 h35
  text "A4" at 40657,4143.5 h35
  text "A8" at 40756,4143.5 h35
  text "A2" at 40861,4143.5 h35
  text "A15" at 40948,4143.5 h35
  text "C2" at 41059,4143.5 h35
  text "C13" at 41152,4143.5 h35
  text "C14" at 41248,4143.5 h35
  text "C15" at 41347,4143.5 h35
  text "States" at 41572,3795 h78.74 r359
  text "LED" at 41596,3708 h78.74
  text "OUTPUT" at 38314,3691.5 h45
  text "LED2" at 39937,3688.55 h45
  text "采样率：96KHz/192KHz" at 39700,3609 h80 r359
  text "频率响应：>40KHz" at 39694,3516 h80
  text "高度同步收发" at 39694,3423 h80
  text "V4.0" at 40297,3358 h100
  text "超声感知" at 40864,2763 h100 r90
  text "西北农林科技大学" at 41167,2679 h78.74 r90
  text "MEMS PDM Mic" at 41407,2664 h78.74 r90
  text "USB超声音频收发及处理声卡" at 41278,2256 h118.11 r90
  text "DIO" at 39949,1890.5 h35
  text "CLK" at 40042,1890.5 h35
  text "3.3" at 40153,1890.5 h35
  text "GND" at 40240,1890.5 h35
  text "A12" at 40345,1890.5 h35
  text "A11" at 40450,1890.5 h35
  text "3V3" at 40540,1890.5 h35
  text "C8" at 40657,1890.5 h35
  text "C0" at 40759,1890.5 h35
  text "C10" at 40843,1890.5 h35
  text "C11" at 40951,1890.5 h35
  text "GND" at 41038,1890.5 h35
  text "C5" at 41155,1887.5 h35
  text "C12" at 41248,1887.5 h35
  text "D2" at 41356,1887.5 h35
  text "PH1" at 41449,1887.5 h35
Document:
  lines w0.1: 21948.49,16335.49 21948.51,16335.51